# Altium PCB scale_AD7190.PcbDoc
Units mil, origin at the board's own origin, x right, y up, seen from the top; angles counter-clockwise.
Board outline 1968.5 x 3543.31 mil, 2 copper layers (Top Layer, Bottom Layer); 90 components, 58 nets, 320 pads, 83 vias.
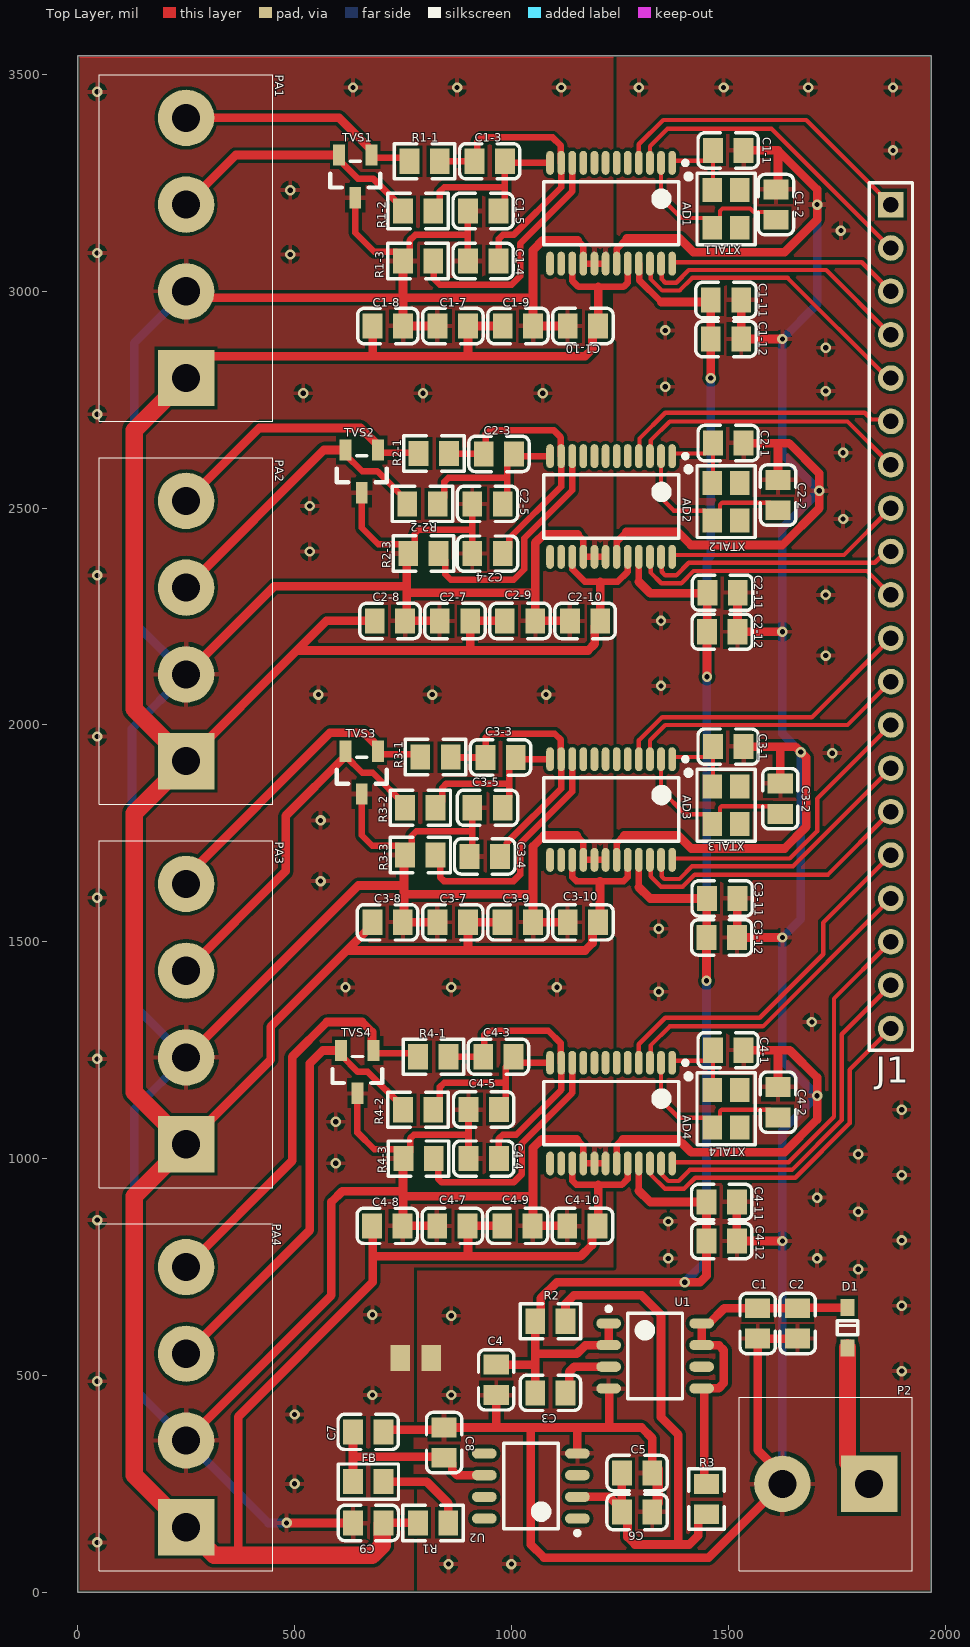
[diagram p0: Top Layer view]
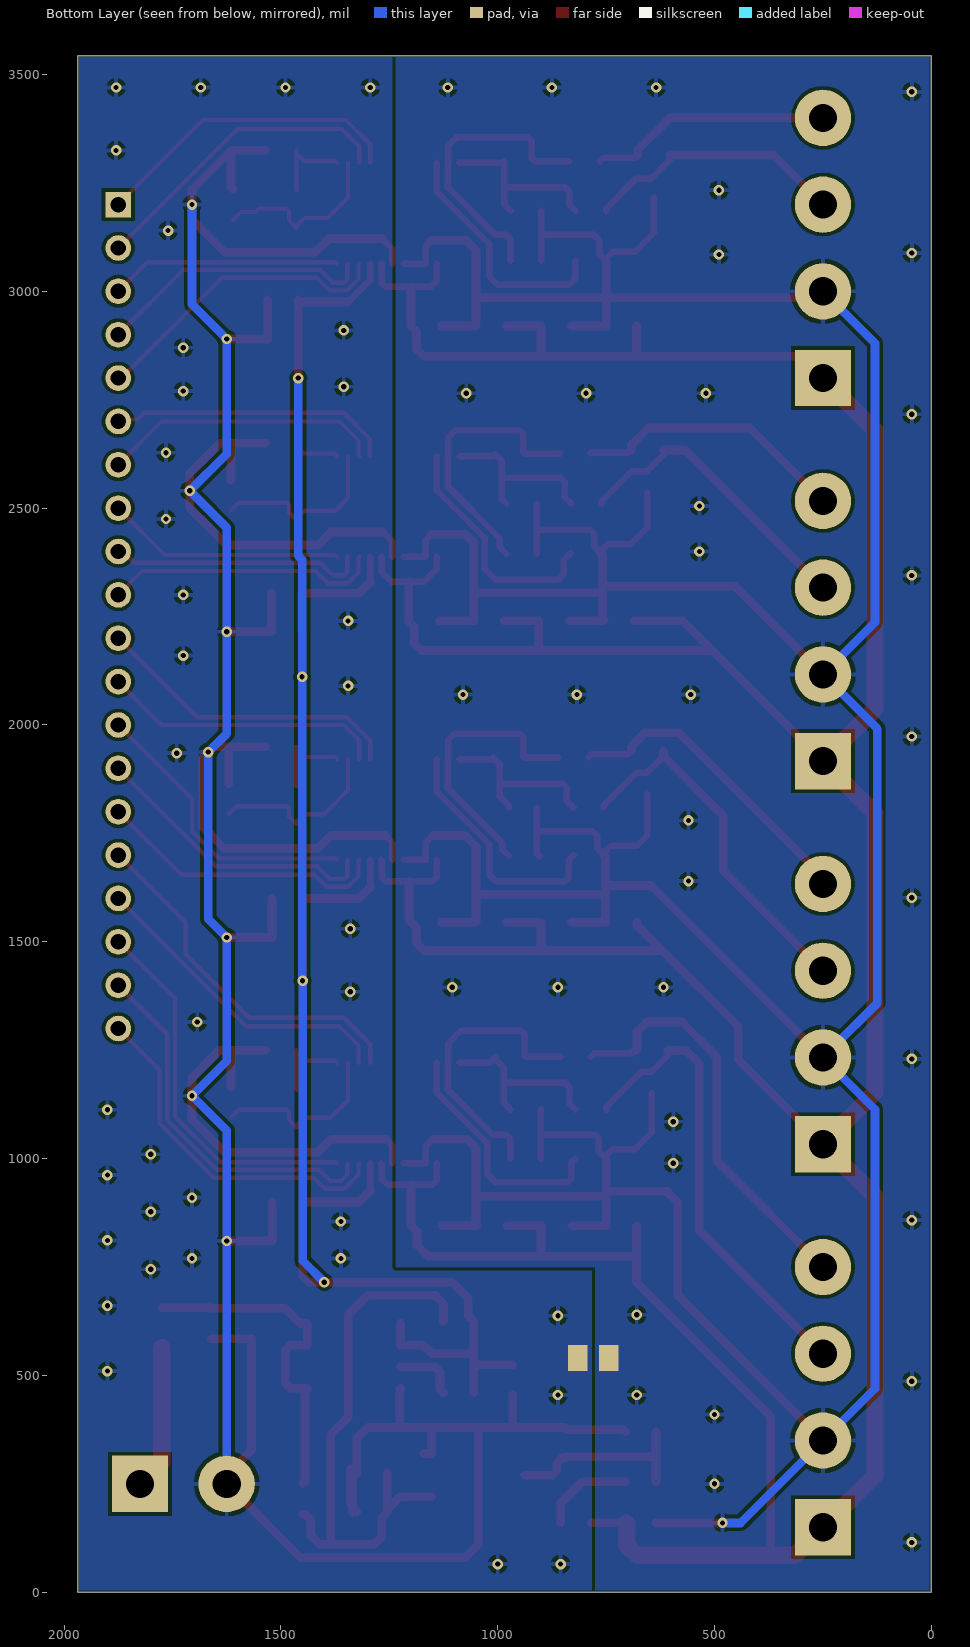
[diagram p1: Bottom Layer view, seen from below]
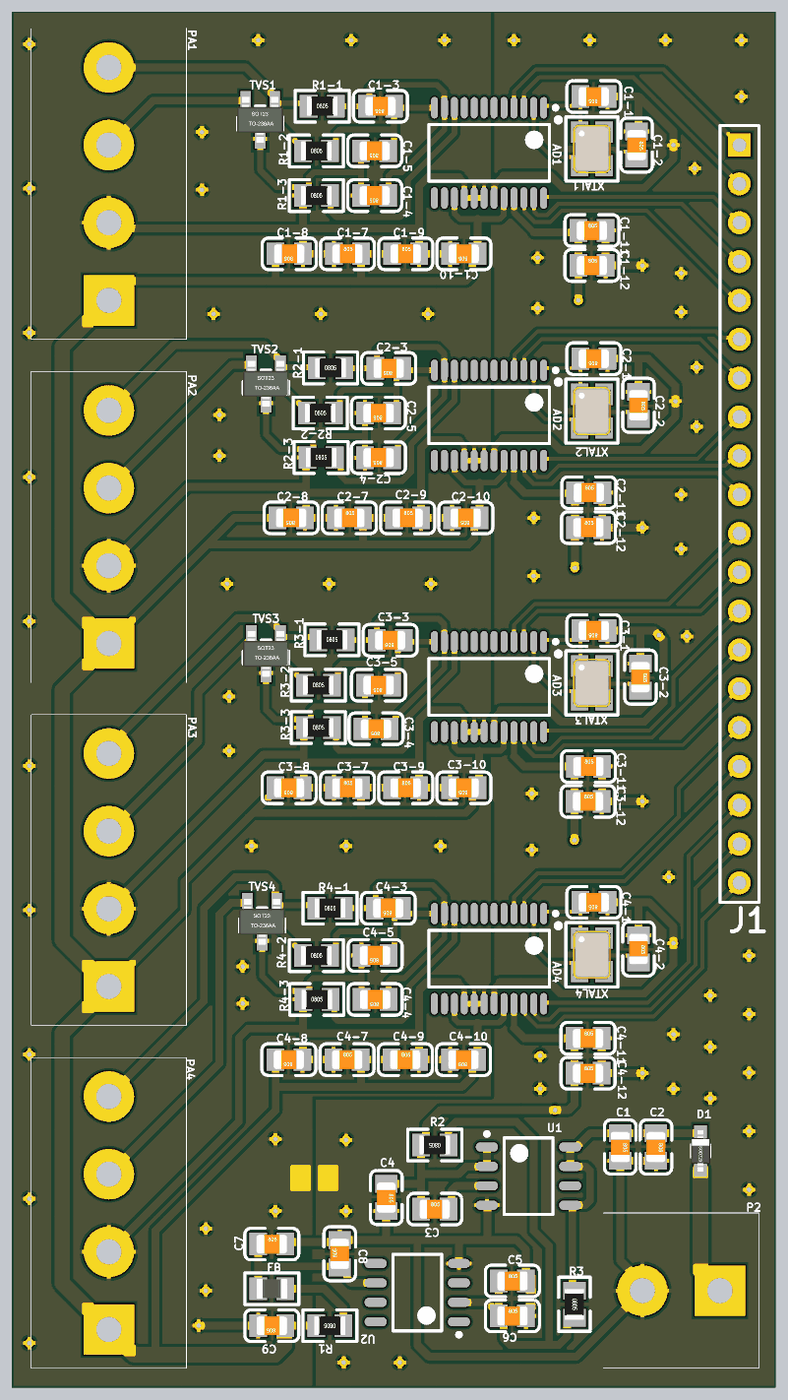
[diagram p2: 3D render of the assembled board from above, using the file's embedded part models]

## Layer stack, top to bottom
Top Solder: solder mask 0.4, Solder Resist, Dk 3.5
Top Layer: signal copper 1.4
Dielectric 1: dielectric 12.6, FR-4, Dk 4.8
Bottom Layer: signal copper 1.4
Bottom Solder: solder mask 0.4, Solder Resist, Dk 3.5

## Board outline
0,0 0,3543.31 1968.5,3543.31 1968.5,0

## Design rules (kind name [scope] priority, off if disabled: settings)
Clearance [All] p1: gap=8 ignorepadtopadclearanceinfootprint=TRUE
PolygonConnect [All] p1: connectstyle=Relief reliefconductorwidth=10 reliefentries=4 polygonreliefangle="90 Angle" airgapwidth=10
RoutingVias [All] p1: holewidth=28 width=50 viastyle="Through Hole" minholewidth=28 minwidth=50 maxholewidth=28 maxwidth=50
SolderMaskExpansion [All] p1: expansion=4
Width [All] p1: maxlimit=40 minlimit=10 preferedwidth=15
30 further rules are at their usual default settings.

## Components (designator, comment, footprint, x,y, rotation, side; value= is the part's Value field where it differs from the comment)
AD1 "AD7190" TSOP-24N_AD7190 1230,3180 r270 top
AD2 "AD7190" TSOP-24N_AD7190 1230,2503.86 r270 top
AD3 "AD7190" TSOP-24N_AD7190 1230,1805 r270 top
AD4 "AD7190" TSOP-24N_AD7190 1230,1105 r270 top
C1 "0.1uF" 0805_C 1567.96,620 r270 top
C1-1 "18pF" 0805_C 1500,3325 r180 top
C1-2 "18pF" 0805_C 1610,3200 r270 top
C1-3 "1.0uF" 0805_C 950,3300 r180 top
C1-4 "0.1uF" 0805_C 935,3070 r180 top
C1-5 "0.1uF" 0805_C 935,3185.24 r180 top
C1-7 "1.0uF" 0805_C 865,2920 r0 top
C1-8 "0.1uF" 0805_C 715,2920 r180 top
C1-9 "0.1uF" 0805_C 1015,2920 r0 top
C1-10 "10uF" 0805_C 1165,2920 r180 top
C1-11 "0.1uF" 0805_C 1495,2980 r0 top
C1-12 "10uF" 0805_C 1495,2890 r0 top
C2 "10uF" 0805_C 1659.96,620 r270 top
C2-1 "18pF" 0805_C 1500,2650 r180 top
C2-2 "18pF" 0805_C 1615,2530 r270 top
C2-3 "1.0uF" 0805_C 971.21,2625 r180 top
C2-4 "0.1uF" 0805_C 945,2395 r180 top
C2-5 "0.1uF" 0805_C 945,2510 r180 top
C2-7 "1.0uF" 0805_C 869.96,2240 r0 top
C2-8 "0.1uF" 0805_C 719.96,2240 r180 top
C2-9 "0.1uF" 0805_C 1019.96,2240 r0 top
C2-10 "10uF" 0805_C 1169.96,2240 r180 top
C2-11 "0.1uF" 0805_C 1487,2305 r0 top
C2-12 "10uF" 0805_C 1486.13,2215 r0 top
C3 "0.1uF" 0805_C 1089.96,460 r0 top
C3-1 "18pF" 0805_C 1500,1950 r180 top
C3-2 "18pF" 0805_C 1620,1829.96 r270 top
C3-3 "1.0uF" 0805_C 975.04,1925 r180 top
C3-4 "0.1uF" 0805_C 938.6,1697 r180 top
C3-5 "0.1uF" 0805_C 945,1809.14 r180 top
C3-7 "1.0uF" 0805_C 864.92,1545 r0 top
C3-8 "0.1uF" 0805_C 714.48,1545 r180 top
C3-9 "0.1uF" 0805_C 1014.92,1545 r0 top
C3-10 "10uF" 0805_C 1164.92,1545 r180 top
C3-11 "0.1uF" 0805_C 1486.13,1600 r0 top
C3-12 "10uF" 0805_C 1485,1510 r0 top
C4 "4.7uF" 0805_C 965.04,490 r270 top
C4-1 "18pF" 0805_C 1500,1250 r180 top
C4-2 "18pF" 0805_C 1615,1130 r270 top
C4-3 "1.0uF" 0805_C 970,1235 r180 top
C4-4 "0.1uF" 0805_C 936.25,1000 r180 top
C4-5 "0.1uF" 0805_C 936.17,1113.28 r180 top
C4-7 "1.0uF" 0805_C 863.9,845 r0 top
C4-8 "0.1uF" 0805_C 713.9,845 r180 top
C4-9 "0.1uF" 0805_C 1013.9,845 r0 top
C4-10 "10uF" 0805_C 1163.9,845 r180 top
C4-11 "0.1uF" 0805_C 1485,900 r0 top
C4-12 "10uF" 0805_C 1485,810 r0 top
C5 "0.1uF" 0805_C 1289.96,275 r0 top
C6 "10uF" 0805_C 1289.92,185 r0 top
C7 "4.7uF" 0805_C 669.92,370 r0 top
C8 "0.1uF" 0805_C 844.96,345.04 r90 top
C9 "0.1uF" 0805_C 670,159.92 r180 top
D1 "1N4148" SOD-323 1774.96,610 r270 top
FB "Inductor" 0805_L 670,255 r0 top value=100Ω@100MHz
J1 "Header 20" HDR1X20 1875,3200 r270 top
P2 "Header 2" 端子2×5.08 1825,250 r270 top
PA1 "传感器输入" 端子4*5.08 250,2800 r180 top
PA2 "传感器输入" 端子4*5.08 250,1916.67 r180 top
PA3 "传感器输入" 端子4*5.08 250,1033.33 r180 top
PA4 "传感器输入" 端子4*5.08 250,150 r180 top
R1 "1.5Ω" 0805_R 819.6,160 r180 top
R1-1 "100Ω" 0805_R 800,3300 r0 top
R1-2 "100Ω" 0805_R 785,3185 r0 top
R1-3 "0Ω" 0805_R 785,3070 r0 top
R2 "0Ω" 0805_R 1089.96,625 r180 top
R2-1 "100Ω" 0805_R 821.21,2626.06 r0 top
R2-2 "100Ω" 0805_R 795,2510 r0 top
R2-3 "0Ω" 0805_R 797.09,2395.46 r0 top
R3 "0Ω" 0805_R 1449.96,215 r270 top
R3-1 "100Ω" 0805_R 825,1926.06 r0 top
R3-2 "100Ω" 0805_R 790,1809.14 r0 top
R3-3 "0Ω" 0805_R 789.96,1700 r0 top
R4-1 "100Ω" 0805_R 820.04,1235 r0 top
R4-2 "100Ω" 0805_R 785,1112.8 r0 top
R4-3 "0Ω" 0805_R 786.17,1000 r0 top
TVS1 "PSM712-LF-T7" SOT-23(SOT-23-3) 640,3265 r90 top
TVS2 "PSM712-LF-T7" SOT-23(SOT-23-3) 655,2585 r90 top
TVS3 "PSM712-LF-T7" SOT-23(SOT-23-3) 655,1890 r90 top
TVS4 "PSM712-LF-T7" SOT-23(SOT-23-3) 645,1200 r90 top
U1 "ADP3303-A5" SOIC-8N-ADP3303-A5 1331.59,545 r0 top
U2 "LT1461AIS8" SOIC-8N-LT1416 1044.96,245 r180 top
XTAL1 "4.9152MHz" SMD-3225_4P 1495,3190 r270 top
XTAL2 "4.9152MHz" SMD-3225_4P 1495,2515 r270 top
XTAL3 "4.9152MHz" SMD-3225_4P 1495,1815 r270 top
XTAL4 "4.9152MHz" SMD-3225_4P 1495,1115 r270 top

## Footprints (in the part's own frame and the unit in brackets; to place one, negate y for a bottom-side part, rotate by r counter-clockwise, add the part's x,y. Pads: shape width x height; smd on the part's side, far side on the other; paste and mask are expansions set on the pad)
0805_C [mm]
  rect 1.16x1.47 smd: 1(-0.89,0) 2(0.89,0)
  silkscreen extent -1.77,-1.04 1.77,1.04, body extent -1,-0.62 1,0.63, height 0.77
0805_L [mm]
  rect 1.16x1.47 smd: 1(-0.89,0) 2(0.89,0)
  silkscreen extent -1.77,-1.04 1.77,1.03, body extent -1.02,-0.64 1.03,0.64, height 0.6
0805_R [mm]
  rect 1.16x1.47 smd: 1(-0.89,0) 2(0.89,0)
  silkscreen extent -1.77,-1.04 1.77,1.03, body extent -1,-0.62 1,0.63, height 0.49
HDR1X20 [mm] "Connector; Header; 20 Position"
  rect 1.5x1.5 hole 0.9: 1(0,0)
  round 1.5 hole 0.9: 2(2.54,0) 3(5.08,0) 4(7.62,0) 5(10.16,0) 6(12.7,0) 7(15.24,0) 8(17.78,0) 9(20.32,0) 10(22.86,0) 11(25.4,0) 12(27.94,0) 13(30.48,0) 14(33.02,0) 15(35.56,0) 16(38.1,0) 17(40.64,0) 18(43.18,0) 19(45.72,0) 20(48.26,0)
  silkscreen extent -1.27,-1.27 49.53,1.27
SMD-3225_4P [mm]
  rect 1.4x1.15 smd: 1(-1.1,-0.8) 2(1.1,-0.8) 3(1.1,0.8) 4(-1.1,0.8)
  silkscreen extent -2.1,-2.35 2.1,1.7, body extent -1.6,-1.25 1.6,1.25, height 0.61
SOD-323 [mm]
  rect 1x0.83 smd: 1(1.18,0) 2(-1.18,0)
  silkscreen extent -0.4,-0.6 0.4,0.6, body extent -1.35,-0.62 1.35,0.63, height 1.1
SOIC-8N-ADP3303-A5 [mm] "SOIC, 8-Leads, Body 4.90x3.90mm, Pitch 1.27mm, IPC Medium Density"
  oval 1.45x0.6 smd: 1(-2.725,1.905) 2(-2.725,0.635) 3(-2.725,-0.635) 4(-2.725,-1.905) 5(2.725,-1.905) 6(2.725,-0.635) 7(2.725,0.635) 8(2.725,1.905)
  silkscreen extent -2.85,-2.5 1.6,2.88, body extent -2,-2.5 2,2.5, height 1.55
SOIC-8N-LT1416 [mm]
  oval 1.45x0.6 smd: 1(-2.725,1.905) 2(-2.725,0.635) 3(-2.725,-0.635) 4(-2.725,-1.905) 5(2.725,-1.905) 6(2.725,-0.635) 7(2.725,0.635) 8(2.725,1.905)
  silkscreen extent -2.85,-2.5 1.6,2.88, body extent -2,-2.5 2,2.5, height 1.55
SOT-23(SOT-23-3) [mm]
  rect 1.25x0.7 smd: 1(1.25,-0.95) 2(1.25,0.95) 3(-1.25,0)
  silkscreen extent -0.65,-1.46 0.9,1.46, body extent -1.5,-1.5 1.5,1.5, height 1.3
TSOP-24N_AD7190 [mm] "TSOP, 24-Leads, Body 7.80x4.40mm, Pitch 0.65mm, IPC Medium Density"
  oval 1.4x0.45 smd: 1(-2.95,3.575) 2(-2.95,2.925) 3(-2.95,2.275) 4(-2.95,1.625) 5(-2.95,0.975) 6(-2.95,0.325) 7(-2.95,-0.325) 8(-2.95,-0.975) 9(-2.95,-1.625) 10(-2.95,-2.275) 11(-2.95,-2.925) 12(-2.95,-3.575) 13(2.95,-3.575) 14(2.95,-2.925) 15(2.95,-2.275) 16(2.95,-1.625) 17(2.95,-0.975) 18(2.95,-0.325) 19(2.95,0.325) 20(2.95,0.975) 21(2.95,1.625) 22(2.95,2.275) 23(2.95,2.925) 24(2.95,3.575)
  silkscreen extent -3.07,-3.95 1.85,4.47, body extent -2.25,-3.95 2.25,3.95, height 1.2
端子2×5.08 [mil]
  rect 130x130 hole 65: 1(0,0)
  round 130 hole 65: 2(0,-200)
  silkscreen extent -200,-300 200,100
端子4*5.08 [mil]
  rect 130x130 hole 65: 1(0,0)
  round 130 hole 65: 2(0,-200) 3(0,-400) 4(0,-600)
  silkscreen extent -200,-700 200,100

## Part data
C1 C1-3 C1-4 C1-5 C1-7 C1-8 C2-3 C2-4 C2-5 C2-7 C2-8 C3 C3-3 C3-4 C3-5 C3-7 C3-8 C4-3 C4-4 C4-5 C4-7 C4-8 C5 C7 C8 C9: library part "0402 1.0uF (105) 10% 25V", "贴片电容", Package=0402, SuppliersPartNumber=C52923, ComponentLink1Description=¹©Ó, ComponentLink1URL=http://www.szlcsc.com/product/details_53938.html, Supplier=LC
C1-1 C1-2 C2-1 C2-2 C3-1 C3-2 C4-1 C4-2: library part "0402 15pF (150) 5% 50V", "贴片电容", Package=0402, SuppliersPartNumber=C1548, ComponentLink1Description=¹©Ó, ComponentLink1URL=http://www.szlcsc.com/product/details_1900.html, Supplier=LC
C1-9 C1-10 C1-11 C1-12 C2 C2-9 C2-10 C2-11 C2-12 C3-9 C3-10 C3-11 C3-12 C4 C4-9 C4-10 C4-11 C4-12 C6: library part "Cap Pol3", "Polarized Capacitor (Surface Mount)", LatestRevisionDate=29-May-2009, LatestRevisionNote="IPC-7351 Footprint Added.", PackageDescription="Chip Capacitor", PackageReference=C0805, Published=8-Jun-2000, Publisher="Altium Limited"
D1: library part "Diode 1N4148", "High Conductance Fast Diode", Code_JEDEC=DO-204-AH, ComponentLink1Description="Manufacturer Link", ComponentLink1URL=http://www.fairchildsemi.com/, ComponentLink2Description=Datasheet, ComponentLink2URL=http://www.fairchildsemi.com/ds/1N%2F1N4148.pdf, DatasheetVersion=1997, LatestRevisionDate=17-Jul-2002, LatestRevisionNote="Re-released for DXP Platform.", PackageDescription="Diode, Axial; Body 3.8 x 1.9 mm (LxDia. max), Lead Dia. 0.53 mm (max)", PackageReference=DO-35, Published=8-Jun-2000, Publisher="Altium Limited"
J1: "Header, 20-Pin", LatestRevisionDate=17-Jul-2002, LatestRevisionNote="Re-released for DXP Platform.", Publisher="Altium Limited"
P2: "Header, 2-Pin", LatestRevisionDate=17-Jul-2002, LatestRevisionNote="Re-released for DXP Platform.", Publisher="Altium Limited"
PA1 PA2 PA3 PA4: library part "Header 4", "Header, 4-Pin", LatestRevisionDate=17-Jul-2002, LatestRevisionNote="Re-released for DXP Platform.", Publisher="Altium Limited"
R1: library part "0402 1.2KΩ (1201) 1%", "贴片电阻", Package=0402, SuppliersPartNumber=C25862, ComponentLink1Description=¹©Ó, ComponentLink1URL=http://www.szlcsc.com/product/details_26605.html, Supplier=LC
R1-1 R1-2 R1-3 R2 R2-1 R2-2 R2-3 R3 R3-1 R3-2 R3-3 R4-1 R4-2 R4-3: library part "0402 100Ω (1000) 1%", "贴片电阻", Package=0402, SuppliersPartNumber=C25076, ComponentLink1Description=¹©Ó, ComponentLink1URL=http://www.szlcsc.com/product/details_25819.html, Supplier=LC
TVS1 TVS2 TVS3 TVS4: library part PSM712-LF-T7_[C32677], "TVS", Package=SOT-23(SOT-23-3), SuppliersPartNumber=C32677, ComponentLink1Description=¹©Ó, ComponentLink1URL=http://www.szlcsc.com/product/details_33642.html, Supplier=LC
U1: library part ADP3303
XTAL1 XTAL2 XTAL3 XTAL4: library part XTAL, "Crystal Oscillator", LatestRevisionDate=17-Jul-2002, LatestRevisionNote="Re-released for DXP Platform.", PackageDescription="Crystal, Thru-Hole; 2 Leads; Body 3.1 x 8.2 mm (Dia.xH)", PackageReference=R38, Published=8-Jun-2000, Publisher="Altium Limited"
FB: Code_IEC=1005, Code_JEITA=0402, LatestRevisionDate=29-May-2009, LatestRevisionNote="IPC-7351 Footprint Added.", PackageDescription="Chip Inductor", PackageReference=0402-A, Published=8-Jun-2000, Publisher="Altium Limited"

## Free pads (board coordinates)
  rect 45x60 all layers, no hole: 5(743.94,540.2) 6(815,540.2)

## Via types
v1: diameter 24, hole 12, Top Layer to Bottom Layer, 83 vias

## Nets (pads, with @x,y where several pads share a name; then routed paths per layer and width w, separated by ;. In a path a pad name is that pad's centre, name@x,y a point inside that pad or via, vN(x,y) a via of type N, cw(c..) or ccw(c..) an arc to the next point about the centre after c; other vN are vias at no path point)
AGND: AD1.16 AD1.17 AD1.18 AD2.16 AD2.17 AD2.18 AD3.16 AD3.17 AD3.18 AD4.16 AD4.17 AD4.18 C1-4.2 C1-5.2 C1-7.1 C1-8.1 C1-9.2 C1-10.2 C2-4.2 C2-5.2 C2-7.1 C2-8.1 C2-9.2 C2-10.2 C3-4.2 C3-5.2 C3-7.1 C3-8.1 C3-9.2 C3-10.2 C4-4.2 C4-5.2 C4-7.1 C4-8.1 C4-9.2 C4-10.2 C9.2 PA1.2 PA2.2 PA3.2 PA4.2 pad.5 R1-3.1 R2-3.1 R3-3.1 R4-3.1 TVS1.3 TVS2.3 TVS3.3 TVS4.3 | length 12226.8
  Top Layer w15: TVS1.3 640,3134.96 683.52,3091.44 734.63,3091.44 749.96,3076.1 R1-3.1 765.3,3085.33 765.3,3116.99 778.31,3130 897.58,3130 899.96,3127.62 ; TVS4.3 645,1060 683.56,1021.44 735.8,1021.44 751.13,1006.1 R4-3.1 766.47,1015.33 766.47,1046.21 775.26,1055 901.13,1055 ; TVS3.3 655,1745.56 679.13,1721.44 739.59,1721.44 R3-3.1@754.92,1706.1 ; TVS2.3 655,2455 693.1,2416.9 746.72,2416.9 762.05,2401.57 R2-3.1 777.39,2410.8 777.39,2441.21 786.17,2450 909.96,2450 ; R3-3.1 770.26,1715.33 770.26,1744.44 780.82,1755 909.96,1755 ; C1-4.2 899.96,3127.62 ; C1-5.2 899.96,3127.62 ; C4-5.2 901.13,1055 ; C4-4.2 901.13,1000.08 901.13,1055 ; C3-4.2 909.96,1703.4 909.96,1755 ; C3-5.2 909.96,1755 ; C2-4.2 909.96,2450 ; C2-5.2 909.96,2450 ; 1150,1045 1165.5,1029.5 1165.5,989.38 AD4.16 AD4.17 AD4.18 ; 1150,1745 1165.5,1729.5 1165.5,1689.38 AD3.16 AD3.17 AD3.18 ; 1152.53,2440 1165.5,2427.02 1165.5,2388.24 AD2.16 AD2.17 AD2.18 ; 1152.53,3117.47 1165.5,3104.5 1165.5,3064.38 AD1.16 AD1.17 ; AD1.17@1191.09,3063.34 AD1.17 ; AD1.18 AD1.17
  Top Layer w20: PA4.2 585,685 585,900 610,925 750.04,925 ; PA3.2 646.67,1630 752.22,1630 ; PA2.2 453.33,2320 758.53,2320 ; PA1.2@261.06,3011.06 PA1.2 265,2985 750,2985 ; v1(481.65,159.92) 540,159.92 C9.2 ; R1-3.1 R1-3.1 750,2985 ; R4-3.1 750.04,998.9 750.04,925 ; R3-3.1 752.22,1697.3 752.22,1630 ; R2-3.1 758.53,2391.94 758.53,2320 ; C4-7.1 C4-8.1 750.04,846.1 750.04,913.33 ; C3-7.1 C3-8.1 752.22,1547.7 752.22,1610 ; C1-7.1 C1-8.1 C1-8.1 750,2985 ; C2-7.1 C2-8.1 758.53,2243.53 758.53,2305 ; C4-10.2 C4-9.2 1049.96,846.02 1049.96,910 ; C3-10.2 C3-9.2 C3-9.2 1050,1610 ; C1-10.2 C1-9.2 1049.96,2920.08 1049.96,2985 ; C2-10.2 C2-9.2 1055,2305 ; 1150,1045 1070,1045 1049.96,1024.96 1049.96,910 ; 1150,1745 1075,1745 1050,1720 1050,1610 ; 1152.53,2440 1075,2440 1055,2420 1055,2305 ; 1152.53,3117.47 1072.47,3117.47 1049.96,3094.96 1049.96,2985 ; 750,2985 1049.96,2985 ; 750.04,913.33 1046.63,913.33 1049.96,910 ; 750.04,913.33 750.04,925 ; 752.22,1610 1050,1610 ; 752.22,1610 752.22,1630 ; 758.53,2305 1055,2305 ; 758.53,2305 758.53,2320
  Bottom Layer w20: PA1.2 130,2880 130,2236.67 PA2.2 125,1991.67 125,1358.33 228.33,1255 250,1255 PA3.2 130,1113.33 130,470 PA4.2 440.08,159.92 v1(481.65,159.92)
  other v1: 45,115 500,250.04 500,410 679.44,454.88 45,486.67 679.44,640 45,858.33 595,989.38 595,1085 45,1230 617.6,1395 861.3,1395 1105,1395 45,1601.67 560,1640 560,1780 45,1973.33 555,2070 817.5,2070 1080,2070 45,2345 535,2400 535,2505 45,2716.67 520,2765 796.24,2765 1072.47,2765 490,3085 45,3088.33 490,3233.31 45,3460 634.88,3470 874.94,3470 1115,3470
AIN1-1: PA1.4 R1-1.1 TVS1.1 | length 562.7
  Top Layer w15: TVS1.1 683.68,3307.93 757.03,3307.93 R1-1.1
  Top Layer w20: PA1.4 602.44,3400 677.4,3325.04 TVS1.1
AIN1-2: PA1.3 R1-2.1 TVS1.2 | length 599.9
  Top Layer w15: TVS1.2@602.6,3303.39 645.98,3260 681.06,3260 749.96,3191.1 R1-2.1
  Top Layer w20: PA1.3 364.21,3314.21 TVS1.2
AIN2-1: PA2.4 R2-1.1 TVS2.1 | length 636.7
  Top Layer w15: TVS2.1 698.68,2627.93 784.3,2627.93 R2-1.1
  Top Layer w20: PA2.4 418.33,2685 652.44,2685 692.4,2645.04 TVS2.1
AIN2-2: PA2.3 R2-2.1 TVS2.2 | length 702.9
  Top Layer w15: TVS2.2 617.6,2623.39 655.98,2585 691.06,2585 759.96,2516.1 R2-2.1
  Top Layer w20: PA2.3 567.55,2634.21 TVS2.2
AIN3-1: PA3.4 R3-1.1 TVS3.1 | length 723.5
  Top Layer w15: TVS3.1 698.68,1932.93 783.09,1932.93 R3-1.1
  Top Layer w20: PA3.4 250,1650 581.82,1981.82 660.62,1981.82 692.4,1950.04 TVS3.1
AIN3-2: PA3.3 R3-2.1 TVS3.2 | length 848.5
  Top Layer w15: TVS3.2@617.6,1928.39 655.98,1890 680.21,1890 754.96,1815.24 R3-2.1
  Top Layer w20: PA3.3 480,1663.33 480,1790.79 617.6,1928.39 TVS3.2
AIN4-1: PA4.4 R4-1.1 TVS4.1 | length 965.6
  Top Layer w15: TVS4.1 688.68,1242.93 777.07,1242.93 R4-1.1
  Top Layer w20: PA4.4 495,995 495,1235 575,1315 655.62,1315 678.62,1292 678.62,1252.99 TVS4.1
AIN4-2: PA4.3 R4-2.1 TVS4.2 | length 1081.1
  Top Layer w15: TVS4.2 607.6,1238.39 645.98,1200 668.86,1200 749.96,1118.9 R4-2.1
  Top Layer w20: PA4.3 535,835 535,1219.21 565,1249.21 TVS4.2
AVDD: AD1.15 AD1.20 AD2.15 AD2.20 AD3.15 AD3.20 AD4.15 AD4.20 C1-7.2 C1-8.2 C1-9.1 C1-10.1 C2-7.2 C2-8.2 C2-9.1 C2-10.1 C3-7.2 C3-8.2 C3-9.1 C3-10.1 C4-7.2 C4-8.2 C4-9.1 C4-10.1 C9.1 PA1.1 PA2.1 PA3.1 PA4.1 R1.2 | length 10581.1
  Top Layer w15: AD4.15 1140.95,988.34 1140.95,949.05 1150,940 1200,940 1255,940 1267.87,952.87 1267.87,988.34 AD4.20 ; AD3.15 1140.95,1688.34 1140.95,1649.05 1150,1640 1204.54,1640 1259.08,1640 1267.87,1648.79 1267.87,1688.34 AD3.20 ; AD2.15 1140.95,2387.2 1140.95,2359.05 1169.41,2330.59 1205,2330.59 1245.59,2330.59 1267.87,2352.87 1267.87,2387.2 AD2.20 ; AD1.15 1140.95,3063.34 1140.95,3024.05 1155,3010 1200,3010 1258.39,3010 1267.87,3019.48 1267.87,3063.34 AD1.20
  Top Layer w20: PA3.1 445,1228.33 445,1304.46 620.54,1480 ; PA2.1 505,2171.67 ; PA1.1 300,2850 680,2850 ; 370,85 370,405 679.96,714.96 679.96,775 ; C4-8.2 679.96,843.9 679.96,775 ; C3-8.2 679.44,1538.9 620.54,1480 ; C1-8.2 C1-8.2 680,2850 ; C2-8.2 573.33,2240 505,2171.67 ; C9.1 705.08,159.96 784.52,159.96 R1.2 ; C4-9.1 C4-7.2 900,843.94 900,775 ; C3-9.1 C3-7.2 C3-7.2 900,1480 ; C1-9.1 C1-7.2 C1-7.2 900,2850 ; C2-9.1 C2-7.2 905,2171.67 ; 1200,940 1200,846.06 C4-10.1 1186.1,832.17 1186.1,800.81 1160.29,775 900,775 ; 1200,3010 C1-10.1 C1-10.1 1187.2,2907.17 1187.2,2867.2 1170,2850 900,2850 ; 1204.54,1640 1204.54,1549.58 C3-10.1 1187.13,1532.17 1187.13,1497.13 1170,1480 900,1480 ; 1205,2330.59 C2-10.1 1192.17,2227.17 1192.17,2187.17 1176.67,2171.67 905,2171.67 ; 505,2171.67 905,2171.67 ; 620.54,1480 900,1480 ; 679.96,775 900,775 ; 680,2850 900,2850
  Top Layer w40: PA1.1 130,2680 130,2036.67 PA2.1 130,1796.67 130,1153.33 PA3.1 130,913.33 130,270 PA4.1 315,85 370,85 678.77,85 702.2,108.43 702.2,157.09 C9.1
C\S\1: AD1.4 J1.1 | length 729.9
  Top Layer w10: AD1.4@1295.45,3297.62 AD1.4 1293.98,3338.98 1350,3395 1680,3395 J1.1
C\S\2: AD2.4 J1.6 | length 653.6
  Top Layer w10: AD2.4 1295.45,2621.48 1295.45,2660.45 1355,2720 1815,2720 1830.47,2704.53 1870.47,2704.53 J1.6
C\S\3: AD3.4 J1.11 | length 721.9
  Top Layer w10: AD3.4 1293.98,1964.43 1347.54,2018 1693,2018 J1.11
C\S\4: AD4.4 J1.16 | length 847.2
  Top Layer w10: AD4.4 1293.98,1263.98 1355,1325 1573,1325 1719.31,1471.31 1719.31,1544.31 J1.16
DIN1: AD1.24 J1.3 | length 533.3
  Top Layer w10: AD1.24 1373.89,3067 1808,3067 J1.3
DIN2: AD2.24 J1.8 | length 551.2
  Top Layer w10: AD2.24 1370.75,2388.44 1374.31,2392 1767,2392 J1.8
DIN3: AD3.24 J1.13 | length 677.1
  Top Layer w10: AD3.24 1373.89,1692 1642,1692 1705,1755 1705,1830 J1.13
DIN4: AD4.24 J1.18 | length 875.6
  Top Layer w10: AD4.24 1373.89,992 1639.53,992 1744,1096.47 1744,1369 J1.18
DOUT1: AD1.23 J1.4 | length 641.7
  Top Layer w10: AD1.23 1346.63,3062.38 1346.63,3028.37 1355,3020 1380,3020 1409,3049 1726,3049 J1.4
DOUT2: AD2.23 J1.9 | length 589.6
  Top Layer w10: AD2.23 1346.63,2386.24 1346.63,2353.37 1355,2345 1380,2345 1409,2374 1838.03,2374 1864.03,2400 J1.9
DOUT3: AD3.23 J1.14 | length 675.3
  Top Layer w10: AD3.23 1346.63,1687.38 1346.63,1650.86 1352.49,1645 1387.46,1645 1416.46,1674 1649.46,1674 1875,1899.54 J1.14
DOUT4: AD4.23 J1.19 | length 863.8
  Top Layer w10: AD4.23 1346.63,987.38 1346.63,963.36 1361.69,948.3 1385.76,948.3 1411.46,974 1646.98,974 1762,1089.02 1762,1287 J1.19
DVDD: AD1.21 AD2.21 AD3.21 AD4.21 C1-11.1 C1-12.1 C2-11.1 C2-12.1 C3-11.1 C3-12.1 C3.1 C4-11.1 C4-12.1 C4.1 R2.2 U1.1 U1.2 | length 4691.8
  Top Layer w15: 1293.98,926.02 AD4.21 ; 1293.98,1626.02 AD3.21 ; 1293.98,2330.59 AD2.21 ; AD1.21 1294.5,3063.34 1294.5,3026.06 1345.36,2975.2
  Top Layer w20: C4.1 965.08,525 1054.92,525 ; C3.1 1054.92,525 ; R2.2@1054.92,615 1054.92,550 ; R2.2 1067.76,637.83 1067.76,677.76 1105,715 v1(1400,715) 1434.96,715 1449.96,730 C4-12.1 C4-11.1 1320,900 1293.98,926.02 ; U1.1 U1.2 1223.62,569.31 1170.29,569.31 1150.98,550 1054.92,550 ; 1293.98,1626.02 1320,1600 C3-11.1 1450.52,1599.44 1450.52,1510.56 C3-12.1 v1(1449.96,1410) ; 1293.98,2330.59 1320.57,2304 1450.96,2304 C2-11.1@1451.52,2304.56 ; 1345.36,2975.2 1455.16,2975.2 C1-11.1 C1-12.1 v1(1459.96,2800) ; v1(1451.09,2111.09) C2-12.1 1451.52,2215.44 C2-11.1@1451.52,2304.56 ; C2-11.1 C2-11.1@1451.52,2304.56 ; 1054.92,525 1054.92,550
  Bottom Layer w20: v1(1400,715) 1449.96,764.96 v1(1449.96,1410) 1450.52,1410.56 1450.52,2110.52 v1(1451.09,2111.09) 1451.09,2381.17 1459.96,2390.04 v1(1459.96,2800)
GND: AD1.19 AD2.19 AD3.19 AD4.19 C1-1.1 C1-2.1 C1-11.2 C1-12.2 C1.2 C2-1.1 C2-2.1 C2-11.2 C2-12.2 C2.2 C3-1.1 C3-2.1 C3-11.2 C3-12.2 C4-1.1 C4-2.1 C4-11.2 C4-12.2 C4.2 C5.2 C6.2 C7.2 C8.2 P2.2 pad.6 U1.4 U2.4 | length 10131.8
  Top Layer w15: AD4.19 1243.31,989.38 1243.31,1031.21 1257.1,1045 ; AD3.19 1243.31,1689.38 1243.31,1728.31 1260,1745 ; AD2.19 1243.31,2388.24 1243.31,2423.31 1265,2445 ; AD1.19 1243.31,3064.38 1243.31,3098.31 1266.69,3121.69
  Top Layer w20: C7.2 710,375.04 839.92,375.04 C8.2 964.96,380.08 ; C4.2 964.96,454.88 964.96,380.08 ; U2.4@1169.96,320 U2.4 1152.24,380.08 ; U1.4 1224.39,470 1226.06,468.33 1226.06,380.08 ; 1257.1,1045 1385,1045 1415,1015 1630,1015 1705,1090 v1(1705,1145) 1705,1187 1642,1250 1615,1250 ; 1260,1745 1385,1745 1415,1715 1630,1715 1680,1765 1680,1925 v1(1667.5,1937.5) 1655,1950 1620,1950 ; 1265,2445 1384,2445 1414,2415 1625,2415 1710,2500 v1(1710,2540) 1710,2580 1640,2650 1615,2650 ; 1266.69,3121.69 1388.31,3121.69 1420,3090 1630,3090 1705,3165 v1(1705,3200) 1705,3235 1615,3325 ; C5.2 1324.98,354.98 1299.88,380.08 1226.06,380.08 ; C6.2@1335.02,185.02 C5.2@1335.02,275 ; C6.2@1340.02,205 C5.2@1340.02,284.98 ; C4-11.2 C4-12.2 v1(1625,810) ; C3-11.2 1520.6,1599.44 1520.6,1510.56 C3-12.2 v1(1625,1510) ; C2-11.2 1521.6,2304.56 1521.6,2215.44 C2-12.2 v1(1625,2215) ; C1-11.2 C1-12.2 v1(1625,2890) ; C4-1.1 1615,1250 ; C3-1.1 1620,1950 ; C2-1.1 1615,2650 ; C1-1.1 1615,3325 ; C1-2.1 1615,3240.04 1615,3325 ; C4-2.1 1615,1250 ; C2-2.1 1615,2650 ; C3-2.1 1620,1950 ; C2.2 C1.2 1567.96,327.31 1625,270.27 P2.2 1455,80 1075,80 1045,110 1045,380.08 ; 964.96,380.08 1045,380.08 ; 1045,380.08 1152.24,380.08 ; 1152.24,380.08 1226.06,380.08
  Bottom Layer w20: P2.2 v1(1625,810) 1625,1065 v1(1705,1145) 1625,1225 v1(1625,1510) 1667.5,1552.5 v1(1667.5,1937.5) 1625,1980 v1(1625,2215) 1625,2455 v1(1710,2540) 1625,2625 v1(1625,2890) 1705,2970 v1(1705,3200)
  other v1: 855.08,65 1000,65 861.3,454.88 1900,510 861.3,637.83 1900,660.7 1800,745 1361.69,770 1705,770 1900,811.4 1361.69,855 1800,877.5 1705,910 1900,962.1 1800,1010 1900,1112.8 1693,1315 1340,1385 1340,1530 1740,1935 1345,2090 1725,2160 1345,2240 1725,2300 1765,2475 1765,2627.93 1725,2770 1355,2780 1725,2870 1355,2910 1760,3140 1880,3325 1293.98,3470 1489.32,3470 1684.66,3470 1880,3470
NetAD1_1: AD1.1 C1-1.2 XTAL1.1 | length 196.7
  Top Layer w10: AD1.1 1370.75,3297.5 1374.31,3301.06 1447.13,3301.06 C1-1.2@1464.96,3318.9 ; XTAL1.1 1464.96,3234.76 C1-1.2@1464.96,3318.9 ; C1-1.2 C1-1.2@1464.96,3318.9
NetAD1_2: AD1.2 C1-2.2 XTAL1.2 | length 418.1
  Top Layer w10: AD1.2 1345.16,3215.86 1391.76,3169.25 1445.87,3169.25 1463.5,3151.61 XTAL1.2 1481.14,3164.33 1481.14,3185.24 1487,3191.1 1550.67,3191.1 1558.98,3182.8 1592.17,3182.8 C1-2.2
NetAD1_10: AD1.10 R1-3.2 | length 565.8
  Top Layer w15: R1-3.2 821.21,3068.83 821.21,3028.83 835.04,3015 1000.52,3015 1020,3034.48 1020,3110 1140.43,3230.43 AD1.10
NetAD1_11: AD1.11 C1-3.2 C1-4.1 R1-1.2 | length 674
  Top Layer w15: R1-1.2 C1-3.2 921.21,3306.25 921.21,3346.21 930,3355 1095,3355 1114.32,3335.68 1114.32,3296.66 AD1.11 1114.84,3239.84 1005,3130 980,3130 971.21,3121.21 971.21,3071.17 C1-4.1
NetAD1_12: AD1.12 C1-3.1 C1-5.1 R1-2.2 | length 432.2
  Top Layer w15: R1-2.2 835.37,3200.33 835.37,3230.41 844.96,3240 985.04,3240 ; C1-5.1 985.04,3200.24 985.04,3240 ; AD1.12 988.9,3296.14 C1-3.1 985.04,3240
NetAD2_1: AD2.1 C2-1.2 XTAL2.1 | length 197.9
  Top Layer w10: AD2.1 1370.75,2622.5 1374.31,2626.06 1447.13,2626.06 C2-1.2@1464.96,2643.9 ; XTAL2.1 1464.96,2559.76 C2-1.2@1464.96,2643.9 ; C2-1.2 C2-1.2@1464.96,2643.9
NetAD2_2: AD2.2 C2-2.2 XTAL2.2 | length 425.7
  Top Layer w10: AD2.2 1345.16,2523.84 1374.75,2494.25 1445.87,2494.25 1463.5,2476.61 XTAL2.2 1481.14,2489.33 1481.14,2507.81 1486.13,2512.8 1597.17,2512.8 C2-2.2
NetAD2_10: AD2.10 R2-3.2 | length 558.4
  Top Layer w15: R2-3.2 847.46,2380.13 847.46,2347.54 860,2335 1005.45,2335 1029.5,2359.05 1029.5,2430.56 1140.43,2541.5 AD2.10
NetAD2_11: AD2.11 C2-3.2 C2-4.1 R2-1.2 | length 636.4
  Top Layer w15: R2-1.2 857.32,2625 C2-3.2 941.21,2630.04 941.21,2671.21 950,2680 1097.2,2680 1114.32,2662.88 1114.32,2620.52 AD2.11 1114.84,2549.84 995.37,2430.37 995.37,2410.33 C2-4.1
NetAD2_12: AD2.12 C2-3.1 C2-5.1 R2-2.2 | length 417.2
  Top Layer w15: R2-2.2 845.37,2525.33 845.37,2560.37 855,2570 990.92,2570 ; C2-5.1 990.92,2520.88 990.92,2570 ; AD2.12 1011.25,2620 C2-3.1 990.92,2609.67 990.92,2570
NetAD3_1: AD3.1 C3-1.2 XTAL3.1 | length 196.7
  Top Layer w10: AD3.1 1370.75,1922.5 1374.31,1926.06 1447.13,1926.06 C3-1.2@1464.96,1943.9 ; XTAL3.1 1464.96,1859.76 C3-1.2@1464.96,1943.9 ; C3-1.2 C3-1.2@1464.96,1943.9
NetAD3_2: AD3.2 C3-2.2 XTAL3.2 | length 417.4
  Top Layer w10: AD3.2 1345.16,1849.84 1400.75,1794.25 1445.87,1794.25 1463.5,1776.61 XTAL3.2 1481.14,1789.33 1481.14,1809.14 1484.76,1812.76 1602.17,1812.76 C3-2.2
NetAD3_10: AD3.10 R3-3.2 | length 565.9
  Top Layer w15: R3-3.2 835.69,1689.31 835.69,1648.79 844.48,1640 1005.06,1640 1020,1654.94 1020,1726.06 1140.43,1846.5 AD3.10
NetAD3_11: AD3.11 C3-3.2 C3-4.1 R3-1.2 | length 637.2
  Top Layer w15: R3-1.2 861.1,1925 C3-3.2 941.21,1926.21 941.21,1971.21 950,1980 1100,1980 1114.32,1965.68 1114.32,1921.66 AD3.11 1114.84,1853.43 988.97,1727.56 988.97,1712.33 C3-4.1
NetAD3_12: AD3.12 C3-3.1 C3-5.1 R3-2.2 | length 421.9
  Top Layer w15: R3-2.2 840.37,1824.48 840.37,1855 850.37,1865 994.74,1865 ; C3-5.1@975.04,1809.14 975.04,1815.24 994.74,1834.95 994.74,1865 ; AD3.12 1013.94,1921.14 C3-3.1 994.74,1909.67 994.74,1865
NetAD4_1: AD4.1 C4-1.2 XTAL4.1 | length 196.7
  Top Layer w10: AD4.1 1370.75,1222.5 1374.31,1226.06 1447.13,1226.06 C4-1.2@1464.96,1243.9 ; XTAL4.1 1464.96,1159.76 C4-1.2@1464.96,1243.9 ; C4-1.2 C4-1.2@1464.96,1243.9
NetAD4_2: AD4.2 C4-2.2 XTAL4.2 | length 421.2
  Top Layer w10: AD4.2 1345.16,1134.84 1385.75,1094.25 1445.87,1094.25 1463.5,1076.61 XTAL4.2 1481.14,1089.33 1481.14,1109.14 1484.79,1112.8 1597.17,1112.8 C4-2.2
NetAD4_10: AD4.10 R4-3.2 | length 560.3
  Top Layer w15: R4-3.2 830.81,990.4 830.81,953.79 839.6,945 1005,945 1024.46,964.46 1024.46,1035.52 1140.43,1151.5 AD4.10
NetAD4_11: AD4.11 C4-3.2 C4-4.1 R4-1.2 | length 668.5
  Top Layer w15: R4-1.2 C4-3.2 937.39,1237.43 937.39,1286.21 946.17,1295 1085,1295 1114.32,1265.68 1114.32,1221.66 AD4.11 1114.84,1158.43 1011.41,1055 980.08,1055 971.29,1046.21 C4-4.1
NetAD4_12: AD4.12 C4-3.1 C4-5.1 R4-2.2 | length 439.8
  Top Layer w15: R4-2.2 835.37,1128.13 835.37,1165.37 845,1175 986.55,1175 ; C4-5.1 986.55,1128.62 986.55,1175 ; AD4.12 1018.9,1221.14 C4-3.1 1005.04,1228.9 986.55,1210.41 986.55,1175
NetC1_1: C1.1 C2.1 D1.2 R3.1 U1.5 U1.7 U1.8 | length 816
  Top Layer w20: R3.1 1444.42,255.58 1444.42,468.33 1442.75,470 U1.5 1439.57,470.69 1478.24,470.69 1489.96,482.41 1489.96,558.28 1478.94,569.31 1439.57,569.31 U1.7 U1.8 1455.61,620 1490.65,655.04 C1.1 C2.1 1660.67,655.75 1774.25,655.75 D1.2
NetC3_2: C3.2 U1.3 | length 147.6
  Top Layer w20: C3.2 1133.24,468.24 1133.24,508.28 1144.96,520 U1.3
NetC5_1: C5.1 C6.1 R2.1 R3.2 U2.2 | length 1347
  Top Layer w20: R2.1 1125,665.45 1144.55,685 1299.96,685 1344.96,640 1344.96,403.62 1384.96,363.62 1384.96,110 ; U2.2 1225.98,220 1254.88,191.1 C6.1 ; C5.1 C6.1 ; R3.2 1443.86,179.96 1431.02,167.13 1431.02,131.06 1409.96,110 1384.96,110 ; C6.1 1267.72,172.17 1267.72,127.24 1284.96,110 1384.96,110
NetC7_1: C7.1 C8.1 FB.1 U2.6 | length 444.8
  Top Layer w20: C7.1 C7.1 634.92,312.5 ; FB.1 634.92,255.04 634.92,312.5 ; U2.6 874.96,270 863.9,281.06 863.9,297.17 851.06,310 C8.1 842.46,312.5 634.92,312.5
NetFB_2: FB.2 R1.1 | length 215.5
  Top Layer w20: FB.2 804.96,255 854.64,205.32 R1.1
S\Y\N\C\1: AD1.22 J1.5 | length 708.6
  Top Layer w10: AD1.22 1321.04,3062.38 1321.04,3028.5 1347.54,3002 1387.93,3002 1416.92,3031 1637,3031 1868,2800 J1.5
S\Y\N\C\2: AD2.22 J1.10 | length 635.3
  Top Layer w10: AD2.22 1321.04,2386.24 1321.04,2351.5 1345.54,2327 1392,2327 1420,2355 1820,2355 J1.10
S\Y\N\C\3: AD3.22 J1.15 | length 674
  Top Layer w10: AD3.22 1321.04,1687.38 1321.04,1650.99 1345.04,1627 1394.91,1627 1422.91,1655 1730,1655 J1.15
S\Y\N\C\4: AD4.22 J1.20 | length 819.2
  Top Layer w10: AD4.22 1321.04,987.38 1321.04,963.36 1354.1,930.3 1398.21,930.3 1423.91,956 1654.44,956 1780,1081.56 1780,1205 J1.20
SCLK1: AD1.3 J1.2 | length 726.6
  Top Layer w10: AD1.3@1321.04,3297.62 AD1.3 1319.57,3334.57 1360,3375 1600,3375 J1.2
SCLK2: AD2.3 J1.7 | length 650.2
  Top Layer w10: AD2.3 1321.04,2621.48 1321.04,2656.04 1365,2700 1775,2700 J1.7
SCLK3: AD3.3 J1.12 | length 655
  Top Layer w10: AD3.3 1319.57,1964.57 1355,2000 1775,2000 J1.12
SCLK4: AD4.3 J1.17 | length 734.9
  Top Layer w10: AD4.3 1321.04,1222.62 1321.04,1261.04 1365,1305 1580,1305 J1.17
VCC: D1.1 P2.1 | length 334.3
  Top Layer w40: D1.1 1774.96,300.04 P2.1
pads on no net: AD1.5 AD1.6 AD1.7 AD1.8 AD1.9 AD1.13 AD1.14 AD2.5 AD2.6 AD2.7 AD2.8 AD2.9 AD2.13 AD2.14 AD3.5 AD3.6 AD3.7 AD3.8 AD3.9 AD3.13 AD3.14 AD4.5 AD4.6 AD4.7 AD4.8 AD4.9 AD4.13 AD4.14 U1.6 U2.1 U2.3 U2.5 U2.7 U2.8 XTAL1.3 XTAL1.4 XTAL2.3 XTAL2.4 XTAL3.3 XTAL3.4 XTAL4.3 XTAL4.4

## Polygon pours and split planes (outlines as drawn)
GND on Top Layer (solid, pour order 40): 1965,3540 1235,3540 1235,750 775,750 775,5 1965,5
AGND on Top Layer (solid, pour order 36): 5,3540 1235,3540 1235,750 775,750 775,5 5,5
no net on Top Layer (solid, pour order 34): 5,3540
no net on Top Layer (solid, pour order 32): 5,3540 1235,3540
no net on Top Layer "Top Layer-No Net" (solid, pour order 2): 5,3540
GND on Bottom Layer (solid, pour order 42): 1965,3540 1235,3540 1235,750 775,750 775,5 1965,5
AGND on Bottom Layer (solid, pour order 38): 5,3540 1235,3540 1235,750 775,750 775,5 5,5
no net on Bottom Layer "Bottom Layer-No Net" (solid, pour order 20): 5,3540

## Silkscreen, mask and mechanical layers (free items; w line width, h text height)
Mechanical 1:
  the board outline again, w10